# Altium PCB NS6104_60IRF_BRD_V1.0.PcbDoc
Units mm, origin at the board's own origin, x right, y up, seen from the top; angles counter-clockwise.
Board outline 50 x 55.48 mm, 2 copper layers (Top Layer, Bottom Layer); 26 components, 25 nets, 67 pads, 43 vias.
Unrouted connection lines stored in the file: 1.
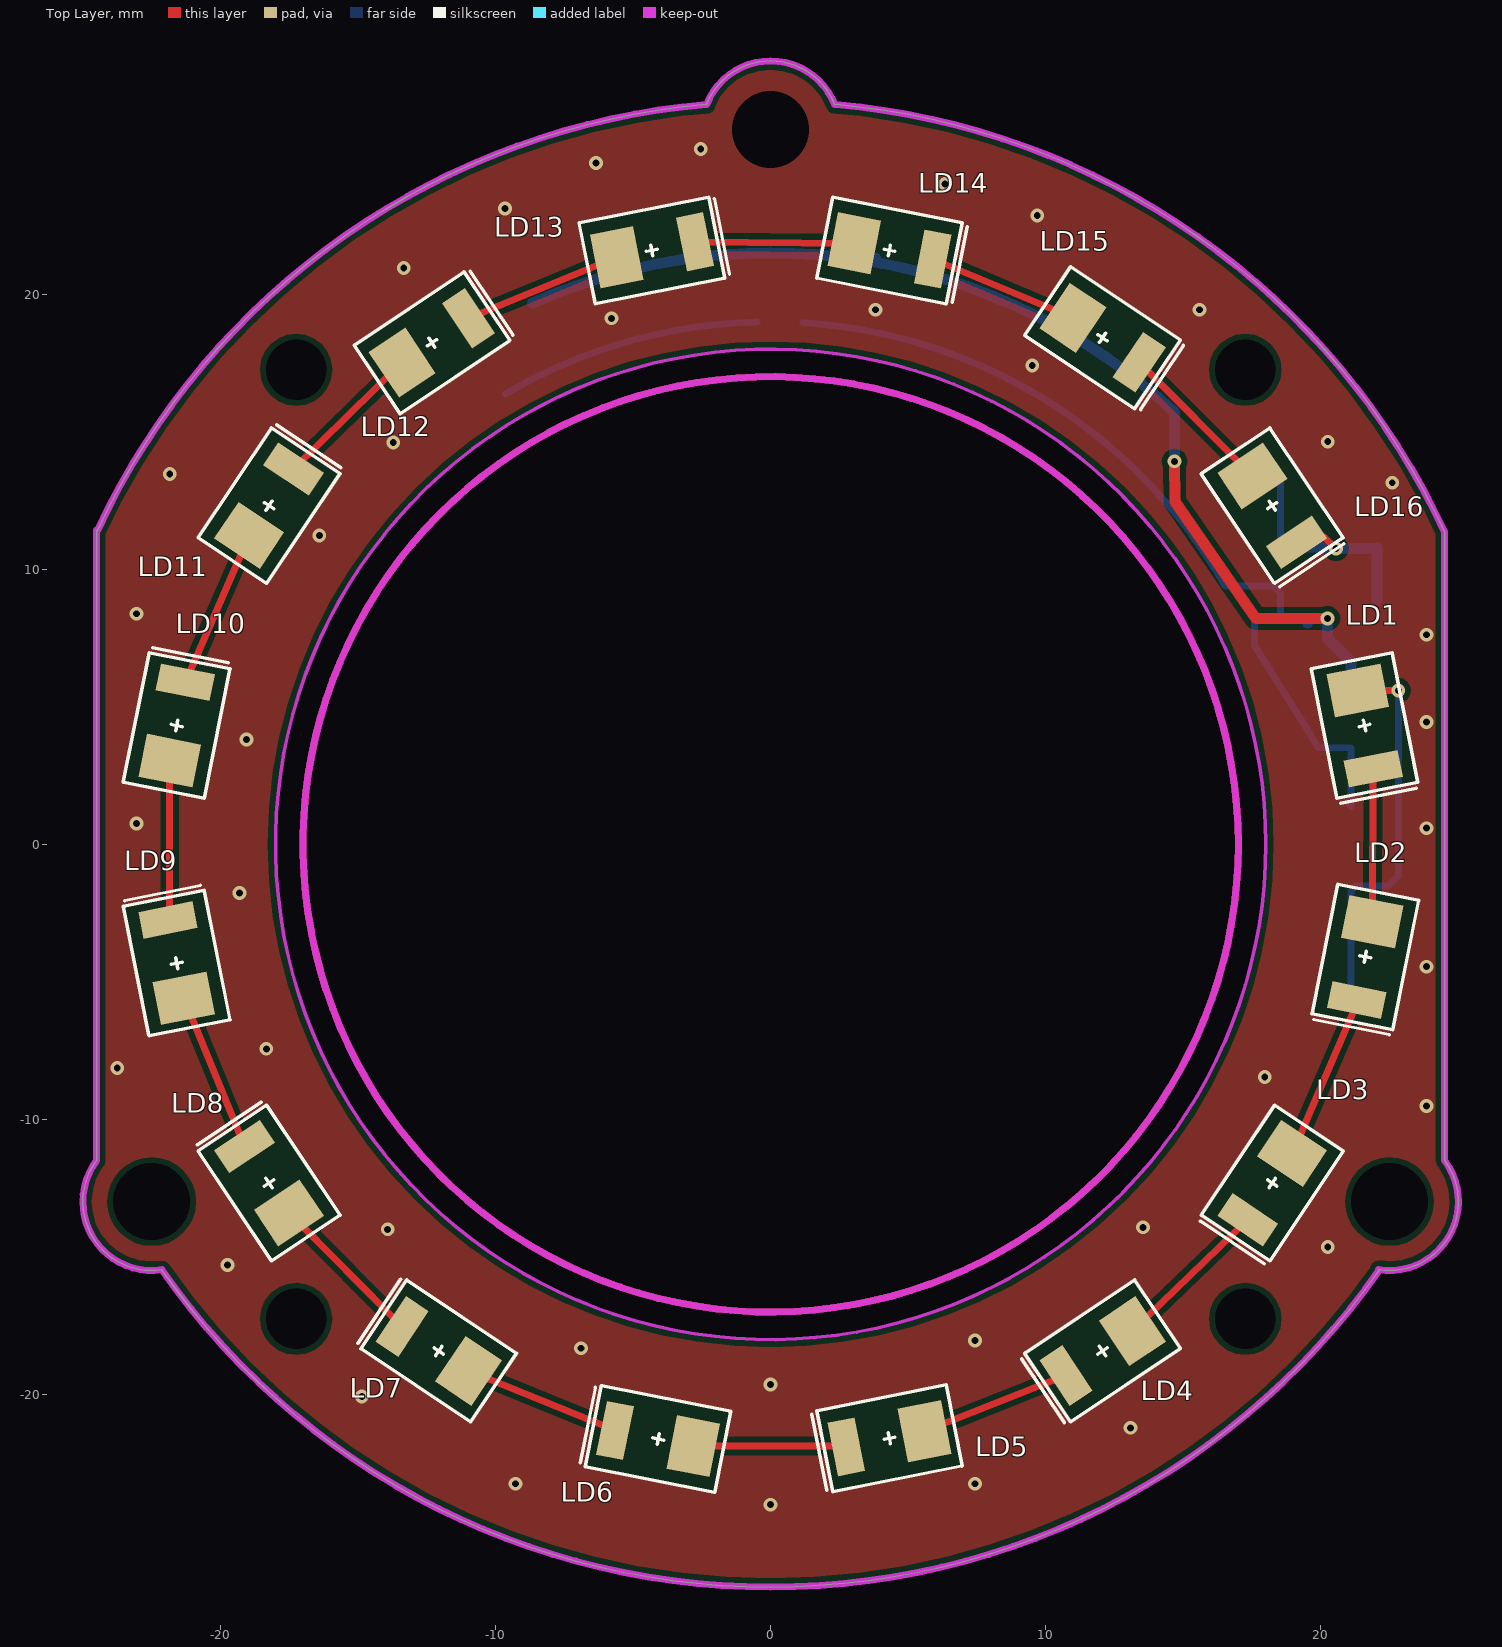
[diagram p0: Top Layer view]
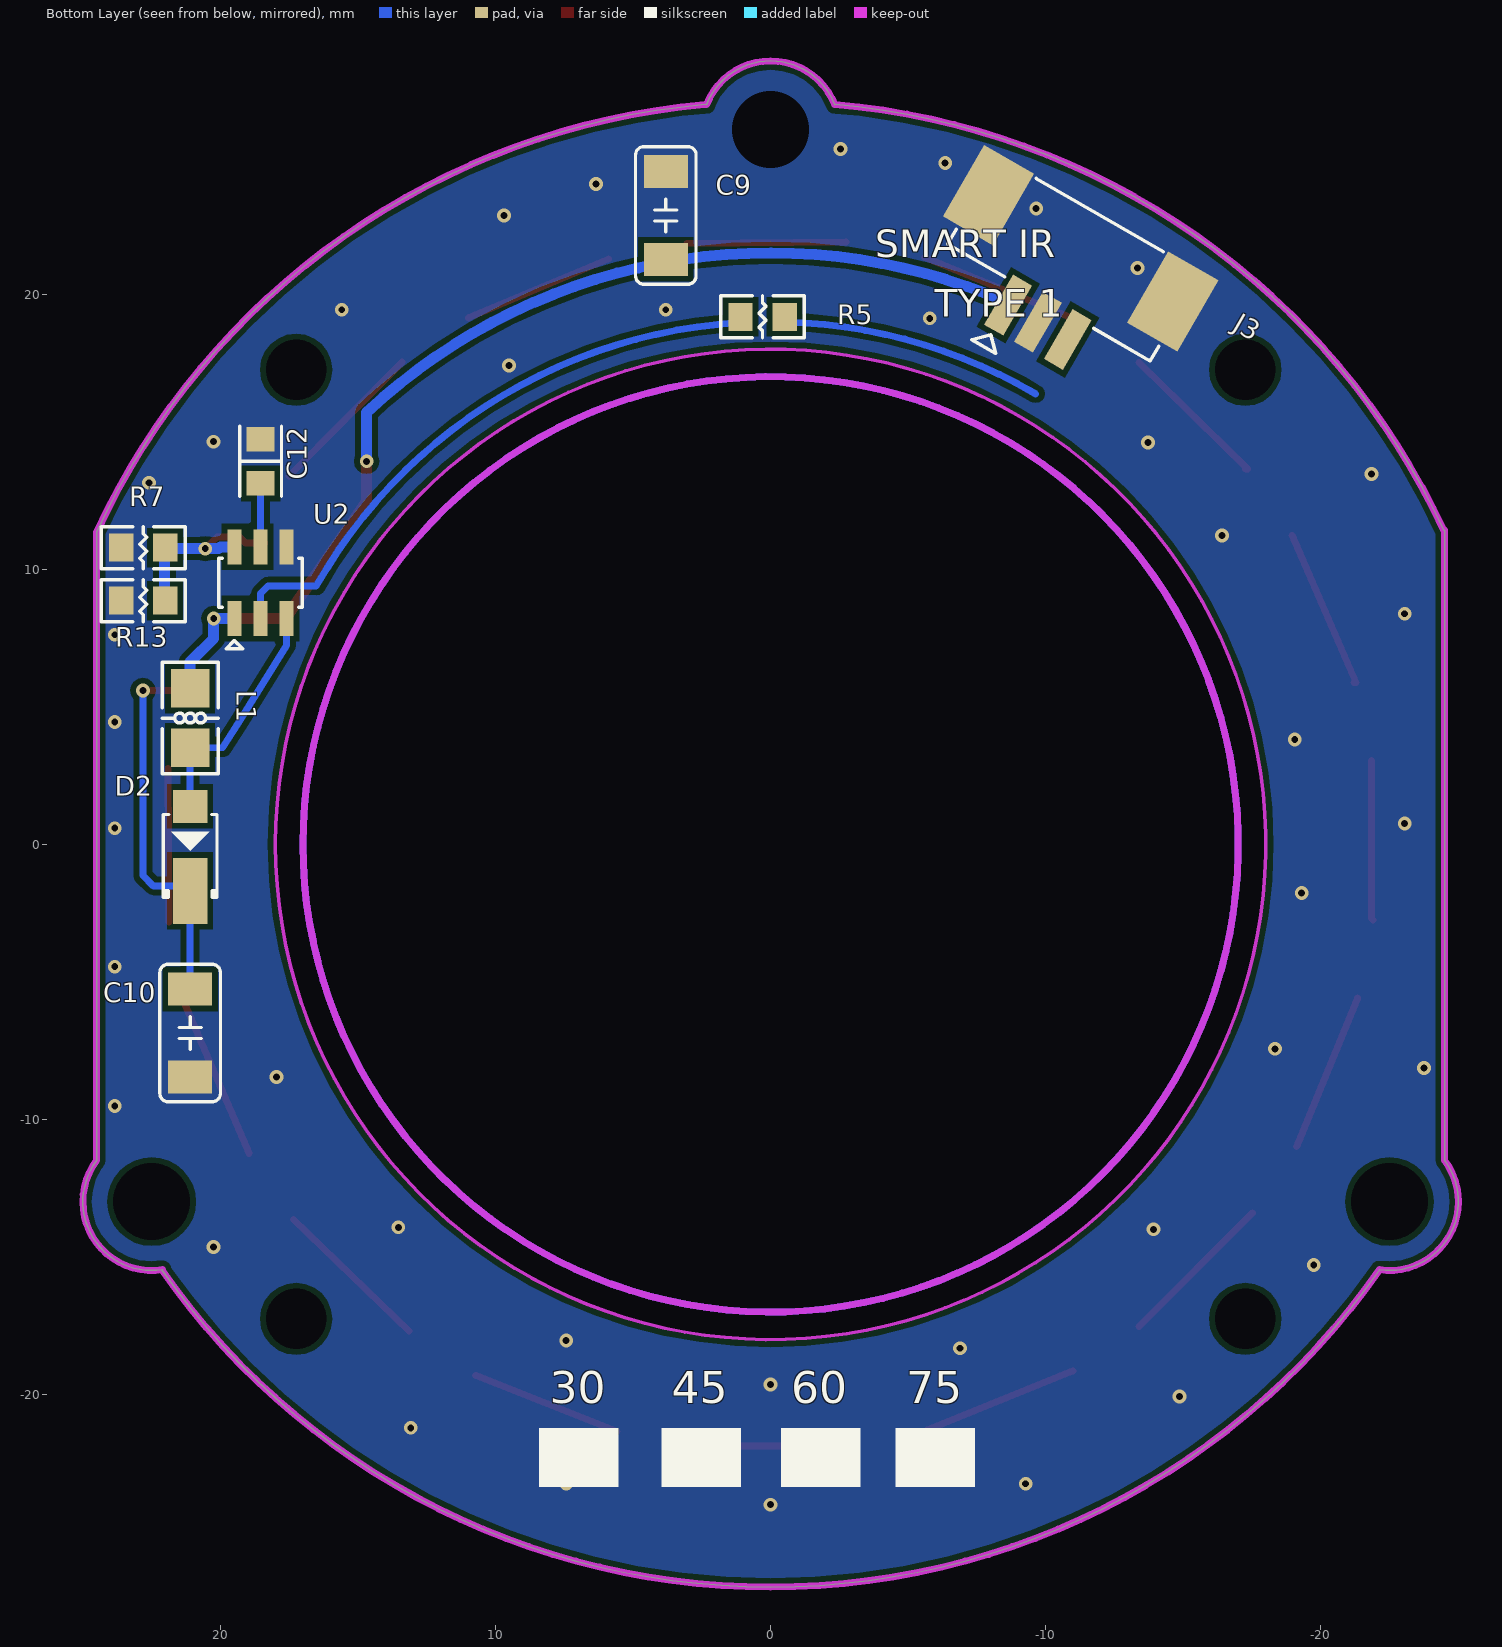
[diagram p1: Bottom Layer view, seen from below]

## Layer stack, top to bottom
Top Solder: solder mask 0.0102, Solder Resist, Dk 3.5
Top Layer: signal copper 0.0356
Dielectric 1: dielectric 0.32, FR-4, Dk 4.8
Bottom Layer: signal copper 0.0356
Bottom Solder: solder mask 0.0102, Solder Resist, Dk 3.5

## Board outline
-22.128,-15.462 cw(c-22.5,-12.99) -24.504,-11.495 -24.5,-11.495 -24.5,11.424 -24.464,11.424 cw(c0,0) -2.33,26.899 -2.329,26.889 cw(c0,25.98) 2.329,26.889 2.382,26.895 cw(c0,0) 24.5,11.347 24.5,-11.425 24.499,-11.489 cw(c22.5,-12.99) 22.099,-15.458 22.134,-15.463 cw(c0,0)
cut-out: 0,-18 ccw(c0,0) 18,0 ccw(c0,0) 0,18 ccw(c0,0) -18,0 ccw(c0,0)

## Design rules (kind name [scope] priority, off if disabled: settings)
Clearance Clearance_3 [OnLayer('Keep-Out Layer') vs InNet('GND')] p1: gap=0.2 ignorepadtopadclearanceinfootprint=FALSE
Clearance Clearance_2 [InComponent('U1')] p2: gap=0.254 ignorepadtopadclearanceinfootprint=FALSE
Clearance [IsRegion] p3: gap=0.2 ignorepadtopadclearanceinfootprint=FALSE
Clearance Clearance_1 [All] p4: gap=0.254 ignorepadtopadclearanceinfootprint=FALSE
ComponentClearance [All] p1: gap=0.254 collisioncheckmode=3 verticalgap=0.1 showdistances=FALSE
HoleSize [All] p1: absolutevalues=TRUE maxlimit=3 minlimit=0.025 maxpercent=80.000 minpercent=20.000
MinimumSolderMaskSliver [All] p1: minsoldermaskwidth=0.1
PolygonConnect [All] p1: connectstyle=Direct reliefconductorwidth=0.254 reliefentries=4 polygonreliefangle="90 Angle" airgapwidth=0.254
RoutingVias [All] p1: holewidth=0.25 width=0.5 viastyle="Through Hole" minholewidth=0.25 minwidth=0.5 maxholewidth=0.25 maxwidth=0.5
SilkToSilkClearance [All] p1: silktosilkclearance=0.1
SilkToSolderMaskClearance [IsPad] p1: minsilkscreentomaskgap=0.05 clearancetoexposedcopper=TRUE
SolderMaskExpansion [All] p1: expansion=0.102
Width Width_1 [InNet('+12V') or InNet('VDD_3.3V') or InNet('GND')] p1: maxlimit=1 minlimit=0.254 preferedwidth=0.254
Width [All] p2: maxlimit=0.4 minlimit=0.254 preferedwidth=0.254
25 further rules are at their usual default settings.

## Components (designator, comment, footprint, x,y, rotation, side; value= is the part's Value field where it differs from the comment)
C9 "4.7uF-25V-3216" C3216 3.81,22.861 r90 bottom
C10 "4.7uF-25V-3216" C3216 21.1,-6.858 r270 bottom
C12 "220nF" CS-1608 18.542,13.922 r270 bottom
D2 "DFLS140" PowerDI123 21.1,-0.466 r90 bottom
J3 "12505WS-03" 12505WS-3P -10.49,20.32 r30 bottom
L1 "10uH" LS-2012 21.1,4.591 r90 bottom
LD1 "LTJI0108W30" SMD_IR_LED 21.59,4.318 r101.25 top
LD2 "LTJI0108W30" SMD_IR_LED 21.617,-4.09 r78.75 top
LD3 "LTJI0108W30" SMD_IR_LED 18.233,-12.311 r56.25 top
LD4 "LTJI0108W30" SMD_IR_LED 12.065,-18.415 r33.75 top
LD5 "LTJI0108W30" SMD_IR_LED 4.318,-21.59 r11.25 top
LD6 "LTJI0108W30" SMD_IR_LED -4.09,-21.617 r348.75 top
LD7 "LTJI0108W30" SMD_IR_LED -12.065,-18.415 r326.25 top
LD8 "LTJI0108W30" SMD_IR_LED -18.233,-12.311 r303.75 top
LD9 "LTJI0108W30" SMD_IR_LED -21.59,-4.318 r281.25 top
LD10 "LTJI0108W30" SMD_IR_LED -21.59,4.318 r258.75 top
LD11 "LTJI0108W30" SMD_IR_LED -18.233,12.311 r236.25 top
LD12 "LTJI0108W30" SMD_IR_LED -12.311,18.233 r213.75 top
LD13 "LTJI0108W30" SMD_IR_LED -4.318,21.59 r191.25 top
LD14 "LTJI0108W30" SMD_IR_LED 4.318,21.59 r168.75 top
LD15 "LTJI0108W30" SMD_IR_LED 12.065,18.415 r146.25 top
LD16 "LTJI0108W30" SMD_IR_LED 18.233,12.311 r123.75 top
R5 "33" RS-1608 0.295,19.177 r180 bottom
R7 "2_F//NI" RS-1608 22.808,10.785 r0 bottom
R13 "2_F" RS-1608 22.808,8.859 r0 bottom
U2 "TPS61165DBVR" SOT23-6 18.542,9.51 r0 bottom

## Footprints (in the part's own frame and the unit in brackets; to place one, negate y for a bottom-side part, rotate by r counter-clockwise, add the part's x,y. Pads: shape width x height; smd on the part's side, far side on the other; paste and mask are expansions set on the pad)
12505WS-3P [mm]
  rect 0.8x2.1 smd: 1(1.25,1.55) 2(0,1.55) 3(-1.25,1.55)
  rect 2.1x3 smd: 4(3.87,-1.55) 5(-3.87,-1.55)
  silkscreen extent -4.24,-2.95 4.26,3.3
C3216 [mm]
  rect 1.2x1.6 smd: 1(-1.6,0) 2(1.6,0)
  silkscreen extent -2.5,-1.1 2.5,1.1
CS-1608 [mil]
  rect 35x40 smd: 1(-31.5,0) 2(31.5,0)
  silkscreen extent -50,-30 50,30
LS-2012 [mil]
  rect 55x55 smd: 1(-42.5,0) 2(42.5,0)
  silkscreen extent -80,-40 80,40
PowerDI123 [mm]
  rect 1.2x1.25 smd: 1(1.85,0)
  rect 2.4x1.25 smd: 2(-1.225,0)
  silkscreen extent -1.45,-0.97 1.55,0.98
RS-1608 [mil]
  rect 35x40 smd: 1(-31.5,0) 2(31.5,0)
  silkscreen extent -60,-30 60,30
SMD_IR_LED [mm]
  rect 1.6x2 smd: 1(1.3,0)
  rect 1x2 smd: 2(-1.6,0)
  Top Layer pour cut-out: -2.375,1.475 -2.4,-1.475 2.425,-1.5 2.4,1.5
  silkscreen extent -2.6,-1.5 2.4,1.5
SOT23-6 [mm]
  rect 0.508x1.27 smd: 1(0.95,1.3) 2(0,1.3) 3(-0.95,1.3) 4(-0.95,-1.3) 5(0,-1.3) 6(0.95,-1.3)
  silkscreen extent -1.52,-0.89 1.52,2.4

## Free pads (board coordinates)
  round 1.254 hole 2.2: 0(-17.25,-17.25) 0(-17.25,17.25) 0(17.25,-17.25) 0(17.25,17.25)
  round 1.524 on Drill Drawing: 0(0,0)
  round 1.254 hole 2.8: 4(0,25.98) 5(22.5,-12.99) 6(-22.5,-12.99)

## Via types
v1: diameter 0.5, hole 0.25, Top Layer to Bottom Layer, tented both sides, 43 vias

## Nets (pads, with @x,y where several pads share a name; then routed paths per layer and width w, separated by ;. In a path a pad name is that pad's centre, name@x,y a point inside that pad or via, vN(x,y) a via of type N, cw(c..) or ccw(c..) an arc to the next point about the centre after c; other vN are vias at no path point)
+12V: C9.1 J3.1 L1.2 U2.1 | length 39.8
  Top Layer w0.4: v1(14.684,13.922) 14.692,12.471 17.645,8.204 ; 17.654,8.21 v1(20.243,8.21)
  Bottom Layer w0.4: J3.1@-8.65,19.683 cw(c0,0) 14.684,15.704 v1(14.684,13.922) ; C9.1 C9.1@3.81,21.311 ; U2.1@19.513,8.055 19.668,8.21 v1(20.243,8.21) 20.243,7.485 21.1,6.627 L1.2
GND: C9.2 C10.2 C12.1 J3.2 J3.4 J3.5 pad.4 R7.2 R13.2 U2.4
  other v1: 0,-24.003 -9.271,-23.241 7.433,-23.241 13.081,-21.209 -14.859,-20.066 0,-19.635 -6.888,-18.316 7.433,-18.034 -19.742,-15.294 20.25,-14.639 -13.922,-13.995 13.533,-13.922 23.841,-9.51 17.961,-8.458 -23.749,-8.128 -18.33,-7.433 23.841,-4.445 -19.304,-1.765 23.841,0.589 -23.046,0.762 -19.05,3.81 23.841,4.445 23.841,7.62 -23.046,8.382 -16.404,11.23 22.595,13.145 -21.844,13.467 -13.716,14.605 20.25,14.639 9.51,17.404 -5.786,19.122 3.81,19.431 15.588,19.431 -13.335,20.955 9.691,22.861 -9.652,23.114 6.344,24.004 -6.344,24.765 -2.54,25.273
IR_ANODE: C10.1 D2.2 LD1.1 | length 13.7
  Top Layer w0.254: LD1.1 v1(22.817,5.593)
  Bottom Layer w0.254: C10.1 D2.2 21.282,-1.509 22.441,-1.509 22.817,-1.133 v1(22.817,5.593)
IR_CATHODE: LD16.2 R7.1 R13.1 U2.6 | length 6.7
  Top Layer w0.254: LD16.2@18.391,10.959 19.095,10.959 19.312,11.176 20.123,11.176 v1(20.55,10.749)
  Bottom Layer w0.4: U2.6 20.005,10.81 20.066,10.749 v1(20.55,10.749) R7.1@21.856,10.749 ; R13.1@22.033,8.859 R7.1@22.033,10.785
IR_PWM: J3.3 R5.2 | length 9.6
  Bottom Layer w0.254: -9.631,16.378 cw(c0,0) R5.2@-0.501,18.993
N00424: LD1.2 LD2.1 | length 5.6
  Top Layer w0.254: LD2.1 LD1.2
N00428: LD2.2 LD3.1 | length 6
  Top Layer w0.254: LD3.1 LD2.2@21.336,-5.715
N00432: LD3.2 LD4.1 | length 5.8
  Top Layer w0.254: LD4.1 LD3.2
N00436: LD4.2 LD5.1 | length 5.5
  Top Layer w0.254: LD5.1 LD4.2
N00440: LD5.2 LD6.1 | length 5.2
  Top Layer w0.254: LD6.1 LD5.2@2.349,-21.87
N00444: LD6.2 LD7.1 | length 5.7
  Top Layer w0.254: LD7.1 LD6.2
N00448: LD7.2 LD8.1 | length 5.8
  Top Layer w0.254: LD8.1 LD7.2
N00582: LD10.2 LD11.1 | length 5.9
  Top Layer w0.254: LD10.2@-21.201,5.887 LD10.2 LD11.1
N00586: LD9.2 LD10.1 | length 5.8
  Top Layer w0.254: LD9.2 -21.844,-2.69 LD10.1
N00590: LD14.2 LD15.1 | length 5.5
  Top Layer w0.254: LD14.2 LD15.1
N00594: LD13.2 LD14.1 | length 5.8
  Top Layer w0.254: LD13.2 LD14.1
N00598: LD12.2 LD13.1 | length 5.8
  Top Layer w0.254: LD12.2 LD13.1
N00602: LD11.2 LD12.1 | length 5.6
  Top Layer w0.254: LD11.2@-17.261,13.642 LD11.2 LD12.1
N00606: LD15.2 LD16.1 | length 5.8
  Top Layer w0.254: LD15.2 LD16.1
N00816: LD8.2 LD9.1 | length 5.8
  Top Layer w0.254: LD9.1 LD8.2
N16773085: R5.1 U2.2 | length 21.9
  Bottom Layer w0.254: R5.1@1.175,18.964 cw(c0,0) 16.518,9.389 ; 16.534,9.398 18.266,9.398 18.542,9.122 U2.2
N16773109: C12.2 U2.5 | length 2.3
  Bottom Layer w0.254: U2.5 C12.2
N16773253: D2.1 L1.1 U2.3 | length 8.9
  Bottom Layer w0.254: U2.3 17.592,7.232 19.369,4.388 19.916,3.512 L1.1 D2.1 D2.1@20.954,1.531
N16778062: 
N16778084: 

## Polygon pours and split planes (outlines as drawn)
GND on Bottom Layer "gnd" (solid, remove dead copper, pour order 4): -20.447,32.004 -32.004,20.447 -32.004,-12.573 -12.827,-31.75 14.351,-31.75 14.478,-31.75 29.083,-17.145 31.877,-14.351 31.877,9.398 31.877,15.621 15.367,32.131
GND on Top Layer "gnd" (solid, remove dead copper, pour order 6): -17.344,29.845 -30.723,16.466 -30.723,-14.934 -15.812,-29.845 10.086,-29.845 12.824,-29.845 29.66,-13.009 29.66,13.612 13.427,29.845

## Keep-outs
Keep-Out Layer:
  circle w0.127: c0,0 r18
  lines w0.254: -24.504,-11.495 ccw(c-22.5,-12.99) -22.128,-15.462 ; -24.5,-11.495 -24.5,11.424 ; -24.464,11.424 cw(c0,0) -2.33,26.899 ; -22.132,-15.465 ccw(c0,0) 22.134,-15.463 ; -2.329,26.889 cw(c0,25.98) 2.329,26.889 ; 2.382,26.895 cw(c0,0) 24.5,11.347 24.5,-11.425 ; 22.099,-15.458 ccw(c22.5,-12.99) 24.499,-11.489
Multi-Layer:
  lines w0.254: -11.573,-12.453 ccw(c0,0) -11.573,-12.452

## Other copper
Top Layer:
  pour cut-out: -23.505,-2.235 -22.593,-6.888 -19.655,-6.387 -20.589,-1.765
  pour cut-out: -22.593,6.965 -23.525,2.281 -20.587,1.671 -19.655,6.355
  pour cut-out: -11.149,20.813 -15.119,18.16 -13.473,15.652 -9.503,18.305
  pour cut-out: -18.147,15.14 -20.799,11.17 -18.319,9.482 -15.652,13.473
Multi-Layer:
  lines w0.254: -11.573,-12.453 ccw(c0,0) -11.573,-12.452

## Silkscreen, mask and mechanical layers (free items; w line width, h text height)
Bottom Overlay:
  rectangle: 5.525,-23.368 8.412,-21.209
  rectangle: 1.08,-23.368 3.967,-21.209
  rectangle: -3.263,-23.368 -0.375,-21.209
  rectangle: -7.429,-23.368 -4.542,-21.209
  text "SMART IR" at -3.81,21.336 h1
  text "TYPE 1" at -5.969,19.177 h1
  text "75" at -4.923,-20.701 h2
  text "60" at -0.756,-20.701 h2
  text "45" at 3.586,-20.701 h2
  text "30" at 8.031,-20.701 h2
Mechanical 1:
  circle w0.254: c0,0 r18